# Altium PCB carrier board mixing.PcbDoc
Units mil, origin at the board's own origin, x right, y up, seen from the top; angles counter-clockwise.
Board outline 6000 x 4000 mil, 2 copper layers (Top Layer, Bottom Layer); 84 components, 167 nets, 452 pads, 0 vias.
Unrouted connection lines stored in the file: 258.
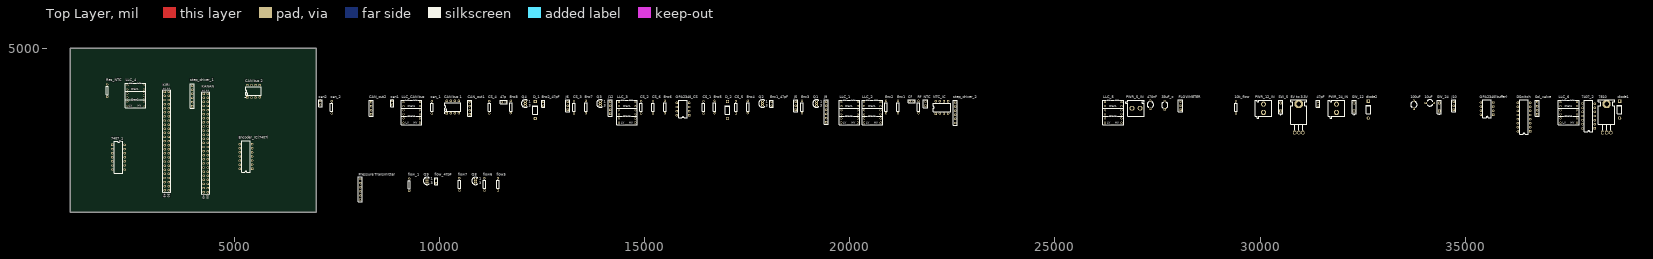
[diagram p0: Top Layer view]
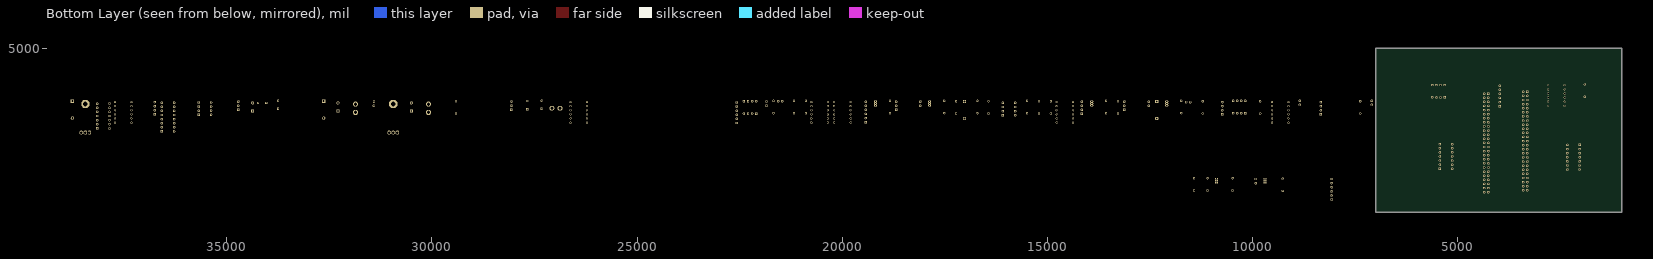
[diagram p1: Bottom Layer view, seen from below]

## Layer stack, top to bottom
Top Solder: solder mask 0.4, Solder Resist, Dk 3.5
Top Layer: signal copper 1.4
Dielectric 1: dielectric 12.6, FR-4, Dk 4.8
Bottom Layer: signal copper 1.4
Bottom Solder: solder mask 0.4, Solder Resist, Dk 3.5

## Board outline
1000,1000 7000,1000 7000,5000 1000,5000

## Design rules (kind name [scope] priority, off if disabled: settings)
Clearance [All] p1: gap=10
PolygonConnect [All] p1: connectstyle=Relief reliefconductorwidth=10 reliefentries=4 polygonreliefangle="90 Angle" airgapwidth=10
RoutingVias [All] p1: holewidth=28 width=50 viastyle="Through Hole" minholewidth=28 minwidth=50 maxholewidth=28 maxwidth=50
SolderMaskExpansion [All] p1: expansion=4
Width [All] p1: maxlimit=10 minlimit=10 preferedwidth=10
29 further rules are at their usual default settings.

## Components (designator, comment, footprint, x,y, rotation, side; value= is the part's Value field where it differs from the comment)
"5V to 3.3V" "7805" My_TO-220 30840,2940 r0 top
10k_flow "Res1" AXIAL-0.3 29410,3555 r90 top
10uF "Cap2" CAPR5-4X5 34135,3665 r0 top
33uF_c "Cap2" CAPR5-4X5 27675,3610 r90 top
47p "Cap" My_cap100n 11570,3685 r0 top
47pF "Cap" My_cap100n 31410,3645 r90 top
100uF "Cap2" CAPR5-4X5 33745,3620 r90 top
470nF "Cap2" CAPR5-4X5 27325,3620 r90 top
7407_1 "7407" 646-06 2180,2340 r270 top
7407_2 "7407" 646-06 38005,3345 r90 top
7810 "7805" My_TO-220 38345,2940 r0 top
can1 "Cap" My_cap100n 8850,3665 r90 top
can2 "Cap" My_cap100n 7100,3665 r90 top
"CAN bus 1" "MCP2551-I/P" PDIP300-P8 10325,3565 r90 top
"CAN bus 2" "MCP2551-I/P" PDIP300-P8 5470,3950 r90 top
can_1 "Res1" AXIAL-0.3 9815,3555 r90 top
can_2 "Res1" AXIAL-0.3 7375,3555 r90 top
CAN_out1 "Header 4" HDR1X4 10735,3385 r90 top
CAN_out2 "Header 4" HDR1X4 8335,3385 r90 top
Cf "Cap" My_cap100n 21510,3705 r0 top
CS_1 "Res1" AXIAL-0.3 16435,3555 r90 top
CS_2 "Res1" AXIAL-0.3 14915,3555 r90 top
CS_3 "Res1" AXIAL-0.3 13280,3555 r90 top
CS_4 "Res1" AXIAL-0.3 11215,3555 r90 top
CS_5 "Res1" AXIAL-0.3 17225,3555 r90 top
CS_6 "Res1" AXIAL-0.3 15205,3555 r90 top
D_1 "1N4001" DO-41 12335,3490 r90 top
D_2 "1N4001" DO-41 17020,3490 r90 top
diode1 "1N4001" DO-41 38760,3500 r90 top
diode2 "1N4001" DO-41 32635,3500 r90 top
DSwitch "ULN2068B" 648C-02 36430,3320 r90 top
Enc1 "Res1" AXIAL-0.3 21175,3565 r90 top
Enc1_47pF "Cap" My_cap100n 18095,3645 r90 top
Enc2 "Res1" AXIAL-0.3 20885,3565 r90 top
Enc2_47pF "Cap" My_cap100n 12530,3645 r90 top
Enc3 "Res1" AXIAL-0.3 18835,3565 r90 top
Enc4 "Res1" AXIAL-0.3 17515,3565 r90 top
Enc5 "Res1" AXIAL-0.3 16705,3565 r90 top
Enc6 "Res1" AXIAL-0.3 15495,3565 r90 top
Enc7 "Res1" AXIAL-0.3 13570,3565 r90 top
Enc8 "Res1" AXIAL-0.3 11740,3565 r90 top
Encoder_IC(7407) "SN74LS14N" 646-06 5285,2360 r90 top
flow5 "Res1" AXIAL-0.3 11425,1680 r90 top
flow6 "Res1" AXIAL-0.3 11095,1680 r90 top
flow7 "Res1" AXIAL-0.3 10485,1680 r90 top
flow_1 "Res1" AXIAL-0.3 9265,1670 r90 top
flow_47pF "Cap" My_cap100n 9925,1760 r90 top
FLOWMETER "Header 3" HDR1X3 28060,3495 r90 top
J5 "Header 3" HDR1X3 18685,3495 r90 top
J6 "Header 3" HDR1X3 13125,3495 r90 top
J9 "Header 6" HDR1X6 19425,3195 r90 top
J10 "Header 3" HDR1X3 34715,3495 r90 top
J12 "Header 4" HDR1X4 14160,3395 r90 top
KANAN "KANAN" HDR2X25 4255,3890 r270 top
KIRI "KIRI" HDR2X25 3305,3935 r270 top
LLC_1 "Logic Level Converter (3.3v - 5v) /  /  / https://www.sparkfun.com/products/8745" LOGIC_LEVEL_CONVERTER 19745,3135 r0 top
LLC_2 "Logic Level Converter (3.3v - 5v) /  /  / https://www.sparkfun.com/products/8745" LOGIC_LEVEL_CONVERTER 20300,3135 r0 top
LLC_3 "Logic Level Converter (3.3v - 5v) /  /  / https://www.sparkfun.com/products/8745" LOGIC_LEVEL_CONVERTER 14325,3135 r0 top
LLC_4 "Logic Level Converter (3.3v - 5v) /  /  / https://www.sparkfun.com/products/8745" LOGIC_LEVEL_CONVERTER 2345,3545 r0 top
LLC_5 "Logic Level Converter (3.3v - 5v) /  /  / https://www.sparkfun.com/products/8745" LOGIC_LEVEL_CONVERTER 26170,3135 r0 top
LLC_6 "Logic Level Converter (3.3v - 5v) /  /  / https://www.sparkfun.com/products/8745" LOGIC_LEVEL_CONVERTER 37270,3135 r0 top
"LLC_CAN bus" "Logic Level Converter (3.3v - 5v) /  /  / https://www.sparkfun.com/products/8745" LOGIC_LEVEL_CONVERTER 9075,3135 r0 top
NTC "Header 2" HDR1X2 21845,3595 r90 top
NTC_IC "LM358P" P008 22245,3555 r0 top
OPA2340(buffer) "LM358P" P008 35530,3525 r90 top
OPA2340_CS "LM358P" P008 15935,3515 r90 top
"Pressure Transmitter" "Header 6" HDR1X6 8075,1310 r90 top
PWR_5_IN "CON2 pin blue" My_CN2 26775,3735 r0 top
PWR_12_IN "CON2 pin blue" My_CN2 29880,3335 r90 top
PWR_24_IN "CON2 pin blue" My_CN2 31660,3335 r90 top
Q1 "BC337" TO-92 19190,3650 r0 top
Q2 "BC337" TO-92 17870,3650 r0 top
Q3 "BC337" TO-92 13920,3650 r0 top
Q4 "BC337" TO-92 12090,3650 r0 top
Q8 "BC337" TO-92 10880,1765 r0 top
Q9 "BC337" TO-92 9700,1765 r0 top
Res_NTC "Res1" AXIAL-0.3 1905,3965 r90 top
Rf "Res1" AXIAL-0.3 21675,3565 r90 top
Sol_valve "Header 4" HDR1X4 36750,3385 r90 top
step_driver_1 "Header 6" HDR1X6 3975,3585 r90 top
step_driver_2 "Header 6" HDR1X6 22570,3175 r90 top
SW_5 "SW-SPST" SPST-2 30500,3565 r90 top
SW_12 "SW-SPST" SPST-2 32290,3565 r90 top
SW_24 "SW-SPST" SPST-2 34365,3565 r90 top

## Footprints (in the part's own frame and the unit in brackets; to place one, negate y for a bottom-side part, rotate by r counter-clockwise, add the part's x,y. Pads: shape width x height; smd on the part's side, far side on the other; paste and mask are expansions set on the pad)
646-06 [mm] "DIP; 14 Leads; Row Spacing 7.62 mm; Pitch 2.54 mm"
  rect 1.5x1.5 hole 0.9: 1(-7.62,-3.81)
  round 1.5 hole 0.9: 2(-5.08,-3.81) 3(-2.54,-3.81) 4(0,-3.81) 5(2.54,-3.81) 6(5.08,-3.81) 7(7.62,-3.81) 8(7.62,3.81) 9(5.08,3.81) 10(2.54,3.81) 11(0,3.81) 12(-2.54,3.81) 13(-5.08,3.81) 14(-7.62,3.81)
  silkscreen extent -9.85,-2.65 9.85,2.65
648C-02 [mm] "DIP; 16 Leads; Row Spacing 7.62 mm; Pitch 2.54 mm"
  rect 1.5x1.5 hole 0.9: 1(-8.89,-3.81)
  round 1.5 hole 0.9: 2(-6.35,-3.81) 3(-3.81,-3.81) 4(-1.27,-3.81) 5(1.27,-3.81) 6(3.81,-3.81) 7(6.35,-3.81) 8(8.89,-3.81) 9(8.89,3.81) 10(6.35,3.81) 11(3.81,3.81) 12(1.27,3.81) 13(-1.27,3.81) 14(-3.81,3.81) 15(-6.35,3.81) 16(-8.89,3.81)
  silkscreen extent -10.7,-2.65 10.7,2.65
AXIAL-0.3 [mm] "Axial Device, Thru-Hole; 2 Leads; 0.3 in Pin Spacing"
  round 1.4 hole 0.85: 1(-3.81,0) 2(3.81,0)
  silkscreen extent -2.77,-0.76 2.77,0.76
CAPR5-4X5 [mm] "Capacitor; 2 Leads"
  rect 1.35x1.35 hole 0.8: 1(-2.5,0)
  round 1.35 hole 0.8: 2(2.5,0)
  silkscreen extent -1.69,-2 1.82,2
DO-41 [mm] "Diode, Axial; Body 5.2 x 2.7 mm (LxDia. max), Lead Dia. 0.86 mm (max)"
  round 2 hole 1.2: 1(-5.23,0)
  rect 2x2 hole 1.2: 2(5.23,0)
  silkscreen extent -2.65,-1.4 2.75,1.4
HDR1X2 [mm] "Connector; Header; 2 Position"
  rect 1.5x1.5 hole 0.9: 1(0,0)
  round 1.5 hole 0.9: 2(2.54,0)
  silkscreen extent -1.27,-1.27 3.81,1.27
HDR1X3 [mm] "Connector; Header; 3 Position"
  rect 1.5x1.5 hole 0.9: 1(0,0)
  round 1.5 hole 0.9: 2(2.54,0) 3(5.08,0)
  silkscreen extent -1.27,-1.27 6.35,1.27
HDR1X4 [mm] "Connector; Header; 4 Position"
  rect 1.5x1.5 hole 0.9: 1(0,0)
  round 1.5 hole 0.9: 2(2.54,0) 3(5.08,0) 4(7.62,0)
  silkscreen extent -1.27,-1.27 8.89,1.27
HDR1X6 [mm] "Connector; Header; 6 Position"
  rect 1.5x1.5 hole 0.9: 1(0,0)
  round 1.5 hole 0.9: 2(2.54,0) 3(5.08,0) 4(7.62,0) 5(10.16,0) 6(12.7,0)
  silkscreen extent -1.27,-1.27 13.97,1.27
HDR2X25 [mm] "Connector; Header; 25x2 Position"
  rect 1.5x1.5 hole 0.9: 1(0,0)
  round 1.5 hole 0.9: 2(0,2.54) 3(2.54,0) 4(2.54,2.54) 5(5.08,0) 6(5.08,2.54) 7(7.62,0) 8(7.62,2.54) 9(10.16,0) 10(10.16,2.54) 11(12.7,0) 12(12.7,2.54) 13(15.24,0) 14(15.24,2.54) 15(17.78,0) 16(17.78,2.54) 17(20.32,0) 18(20.32,2.54) 19(22.86,0) 20(22.86,2.54) 21(25.4,0) 22(25.4,2.54) 23(27.94,0) 24(27.94,2.54) 25(30.48,0) 26(30.48,2.54) 27(33.02,0) 28(33.02,2.54) 29(35.56,0) 30(35.56,2.54) 31(38.1,0) 32(38.1,2.54) 33(40.64,0) 34(40.64,2.54) 35(43.18,0) 36(43.18,2.54) 37(45.72,0) 38(45.72,2.54) 39(48.26,0) 40(48.26,2.54) 41(50.8,0) 42(50.8,2.54) 43(53.34,0) 44(53.34,2.54) 45(55.88,0) 46(55.88,2.54) 47(58.42,0) 48(58.42,2.54) 49(60.96,0) 50(60.96,2.54)
  silkscreen extent -1.27,-1.27 62.23,3.81
LOGIC_LEVEL_CONVERTER [mil]
  round 48 hole 32: P$1(50,550) P$2(50,450) P$3(50,350) P$4(50,250) P$5(50,150) P$6(50,50) P$7(450,50) P$8(450,150) P$9(450,250) P$10(450,350) P$11(450,450) P$12(450,550)
  silkscreen extent 0,0 500,600
My_cap100n [mil]
  oct 60x60 hole 40: 1(-50,0)
  round 60 hole 40: 2(50,0)
  silkscreen extent -90,-40 80,40
My_CN2 [mil]
  oct 120x120 hole 80: 1(99.5,-200.5)
  round 120 hole 80: 2(299.5,-200.5)
  silkscreen extent -45,-400 400,0
My_TO-220 [mil]
  oct 196.85x196.85 hole 118.11: 0(99.49,699.49)
  oct 80x100 hole 60: 1(-0.5,-0.5) 2(99.5,-0.5) 3(199.5,-0.5)
  silkscreen extent -100,60 300,800
P008 [mm] "DIP; 8 Leads; Row Spacing 7.62 mm; Pitch 2.54 mm"
  rect 1.5x1.5 hole 0.9: 1(-3.81,-3.81)
  round 1.5 hole 0.9: 2(-1.27,-3.81) 3(1.27,-3.81) 4(3.81,-3.81) 5(3.81,3.81) 6(1.27,3.81) 7(-1.27,3.81) 8(-3.81,3.81)
  silkscreen extent -5.5,-2.65 5.5,2.65
PDIP300-P8 [mm] "DIP, 8-Leads, Row Spacing 7.62mm, Pitch 2.54mm, Body 9.5x6.6mm"
  rect 1.5x1.5 hole 0.9: 1(-3.81,3.81)
  round 1.5 hole 0.9: 2(-3.81,1.27) 3(-3.81,-1.27) 4(-3.81,-3.81) 5(3.81,-3.81) 6(3.81,-1.27) 7(3.81,1.27) 8(3.81,3.81)
  silkscreen extent -3.93,-4.9 2.65,5.23, body extent -3.55,-4.9 3.55,4.9, height 5.34
SPST-2 [mm] "Switch; 2 Leads"
  rect 1.85x1.85 hole 1.1: 1(-2.54,0)
  round 1.85 hole 1.1: 2(2.54,0)
  silkscreen extent -4.89,-1.27 4.28,1.27
TO-92 [mm] "TO, Flat Index; 3 In-Line, Axial Leads; Body Dia. 4.6mm; Leads 0.41 x 0.39 mm (max)"
  oval 2x1 hole 0.7: 1(0,1.27) 2(0,0) 3(0,-1.27)
  silkscreen extent -2.34,-2.34 1.35,2.34

## Part data
"5V to 3.3V" 7810: "Regulator"
10k_flow can_1 can_2 CS_1 CS_2 CS_3 CS_4 CS_5 CS_6 Enc1 Enc2 Enc3 Enc4 Enc5 Enc6 Enc7 Enc8 flow5 flow6 flow7 flow_1 Res_NTC Rf: "Resistor"
10uF 33uF_c 100uF 470nF: "Capacitor"
47p 47pF can1 can2 Cf Enc1_47pF Enc2_47pF flow_47pF: library part "Cap ceramic", "CAP-100Nf"
7407_1 7407_2: library part SN74LS14N, "Hex Schmitt-Trigger Inverter"
"CAN bus 1" "CAN bus 2": "High-Speed CAN Transceiver, 8-Pin PDIP, Industrial Temperature"
CAN_out1 CAN_out2 J12 Sol_valve: "Header, 4-Pin"
D_1 D_2 diode1 diode2: library part "Diode 1N4001", "1 Amp General Purpose Rectifier"
DSwitch: "Quad 1.5A Darlington Switch"
Encoder_IC(7407): "Hex Schmitt-Trigger Inverter"
FLOWMETER J5 J6 J10: "Header, 3-Pin"
J9 "Pressure Transmitter" step_driver_1 step_driver_2: "Header, 6-Pin"
KANAN KIRI: library part "Header 25X2", "Header, 25-Pin, Dual row"
LLC_1 LLC_2 LLC_3 LLC_4 LLC_5 LLC_6 "LLC_CAN bus": library part LOGIC_LEVEL_CONVERTER
NTC: "Header, 2-Pin"
NTC_IC OPA2340(buffer) OPA2340_CS: "Dual Operational Amplifier"
PWR_5_IN PWR_12_IN PWR_24_IN: "Connector blue screw"
Q1 Q2 Q3 Q4 Q8 Q9: "Transistor, NPN, 300MHz, 40V, 200mA, SOT-23 pkg"
SW_5 SW_12 SW_24: "Single-Pole, Single-Throw Switch"

## Nets (pads, with @x,y where several pads share a name; then routed paths per layer and width w, separated by ;. In a path a pad name is that pad's centre, name@x,y a point inside that pad or via, vN(x,y) a via of type N, cw(c..) or ccw(c..) an arc to the next point about the centre after c; other vN are vias at no path point)
5V: LLC_3.P$9
DINPLC1: J9.4 LLC_1.P$12
DOPLC1: J9.1 LLC_1.P$7
DOPLC2: J9.2 LLC_1.P$8
DOPLC3: J9.3 LLC_1.P$11
DTR_5V: "Pressure Transmitter.4" LLC_2.P$11
GND: 10uF.2 33uF_c.2 47p.1 47pF.1 100uF.2 470nF.2 7407_1.7 7407_2.7 7810.2 "5V to 3.3V.2" "CAN bus 1.2" "CAN bus 2.2" "LLC_CAN bus.P$4" "LLC_CAN bus.P$9" "Pressure Transmitter.1" can1.1 can2.1 CAN_out1.1 CAN_out2.1 Cf.1 CS_4.1 D_1.1 diode2.1 DSwitch.4 DSwitch.5 DSwitch.12 DSwitch.13 Enc1_47pF.1 Enc2_47pF.1 Encoder_IC(7407).7 flow_47pF.1 FLOWMETER.1 J5.1 J6.1 J10.3 J12.4 KANAN.1 KANAN.2 KANAN.49 KANAN.50 KIRI.1 KIRI.2 KIRI.6 KIRI.24 KIRI.49 KIRI.50 LLC_1.P$4 LLC_1.P$9 LLC_2.P$4 LLC_2.P$9 LLC_3.P$4 LLC_3.P$10 LLC_4.P$4 LLC_4.P$9 LLC_5.P$4 LLC_5.P$9 LLC_6.P$4 LLC_6.P$9 NTC.1 NTC_IC.4 OPA2340(buffer).4 OPA2340_CS.4 PWR_5_IN.2 PWR_12_IN.2 PWR_24_IN.2 Q1.3 Q2.3 Q3.3 Q4.3 Q8.3 Q9.3
"Net5V to 3.3V_1": 10k_flow.2 470nF.1 "5V to 3.3V.1" "CAN bus 1.3" "CAN bus 2.3" "LLC_CAN bus.P$10" "Pressure Transmitter.2" can1.2 can2.2 CAN_out1.2 CAN_out2.2 D_2.2 diode1.2 Enc1.1 Enc2.1 Enc5.1 Enc6.1 flow5.1 flow6.1 FLOWMETER.2 J5.2 J6.2 J12.3 LLC_1.P$10 LLC_2.P$10 LLC_4.P$10 LLC_5.P$10 LLC_6.P$10 OPA2340(buffer).8 OPA2340_CS.8 step_driver_2.2 step_driver_2.4 step_driver_2.6 SW_5.2
"Net5V to 3.3V_3": 33uF_c.1 "5V to 3.3V.3" "LLC_CAN bus.P$3" LLC_1.P$3 LLC_2.P$3 LLC_3.P$3 LLC_4.P$3 LLC_5.P$3 LLC_6.P$3 NTC_IC.8 Res_NTC.2
Net10k_flow_1: 10k_flow.1 flow5.2 flow_47pF.2 FLOWMETER.3 Q8.1
Net10uF_1: 10uF.1 7810.3 DSwitch.14
Net47p_2: 47p.2 CS_6.2 D_1.2 D_2.1 OPA2340_CS.3
Net47pF_2: 47pF.2 diode1.1 diode2.2 J10.1 OPA2340(buffer).3
Net100uF_1: 100uF.1 7810.1 SW_12.2
Net7407_1_1: 7407_1.1 LLC_4.P$12
Net7407_1_2: 7407_1.2 step_driver_2.1
Net7407_1_3: 7407_1.3 LLC_4.P$11
Net7407_1_4: 7407_1.4 step_driver_2.3
Net7407_1_5: 7407_1.5 LLC_4.P$8
Net7407_1_6: 7407_1.6 step_driver_2.5
Net7407_1_8: 7407_1.8 step_driver_1.1
Net7407_1_9: 7407_1.9 LLC_5.P$12
Net7407_1_10: 7407_1.10 step_driver_1.3
Net7407_1_11: 7407_1.11 LLC_5.P$11
Net7407_1_12: 7407_1.12 step_driver_1.5
Net7407_1_13: 7407_1.13 LLC_5.P$8
Net7407_2_1: 7407_2.1 LLC_6.P$12
Net7407_2_2: 7407_2.2 DSwitch.3
Net7407_2_3: 7407_2.3 LLC_6.P$11
Net7407_2_4: 7407_2.4 DSwitch.6
Net7407_2_5: 7407_2.5 LLC_6.P$8
Net7407_2_6: 7407_2.6 DSwitch.11
Net7407_2_8: 7407_2.8 DSwitch.15
Net7407_2_9: 7407_2.9 LLC_6.P$7
"NetCAN bus 1_1": "CAN bus 1.1" "LLC_CAN bus.P$12"
"NetCAN bus 1_4": "CAN bus 1.4" "LLC_CAN bus.P$11"
"NetCAN bus 2_1": "CAN bus 2.1" "LLC_CAN bus.P$8"
"NetCAN bus 2_4": "CAN bus 2.4" "LLC_CAN bus.P$7"
Netcan_1_1: "CAN bus 1.6" can_1.1 CAN_out1.4
Netcan_1_2: "CAN bus 1.7" can_1.2 CAN_out1.3
Netcan_2_1: "CAN bus 2.6" can_2.1 CAN_out2.4
Netcan_2_2: "CAN bus 2.7" can_2.2 CAN_out2.3
NetCf_2: Cf.2 NTC_IC.3 Rf.2
NetCS_1_1: CS_1.1 CS_2.2 J9.5
NetCS_1_2: CS_1.2 CS_5.1 OPA2340_CS.6
NetCS_2_1: CS_2.1 CS_3.1 J9.6
NetCS_3_2: CS_3.2 CS_4.2 OPA2340_CS.5
NetCS_5_2: CS_5.2 CS_6.1 OPA2340_CS.7
NetDSwitch_1: DSwitch.1 DSwitch.9 J10.2 SW_24.2
NetDSwitch_2: DSwitch.2 Sol_valve.1
NetDSwitch_8: DSwitch.8 Sol_valve.2
NetDSwitch_10: DSwitch.10 Sol_valve.3
NetDSwitch_16: DSwitch.16 Sol_valve.4
NetEnc1_2: Enc1.2 Enc1_47pF.2 Encoder_IC(7407).4 Q1.1
NetEnc2_2: Enc2.2 Enc3.2 Q2.1
NetEnc2_47pF_2: Enc2_47pF.2 Enc5.2 Encoder_IC(7407).2 Q3.1
NetEnc3_1: Enc3.1 Q1.2
NetEnc4_1: Enc4.1 Q2.2
NetEnc4_2: Enc4.2 J5.3
NetEnc6_2: Enc6.2 Enc7.2 Q4.1
NetEnc7_1: Enc7.1 Q3.2
NetEnc8_1: Enc8.1 Q4.2
NetEnc8_2: Enc8.2 J6.3
NetEncoder_IC(7407)_1: Encoder_IC(7407).1 LLC_4.P$7
NetEncoder_IC(7407)_3: Encoder_IC(7407).3 LLC_5.P$7
NetEncoder_IC(7407)_5: Encoder_IC(7407).5 flow_1.2
NetEncoder_IC(7407)_6: Encoder_IC(7407).6 LLC_3.P$12
Netflow6_2: flow6.2 flow7.2 Q9.1
Netflow7_1: flow7.1 Q8.2
Netflow_1_1: flow_1.1 Q9.2
NetKANAN_5: KANAN.5 KANAN.6
NetKANAN_7: KANAN.7
NetKANAN_8: KANAN.8
NetKANAN_9: KANAN.9
NetKANAN_10: KANAN.10
NetKANAN_11: KANAN.11
NetKANAN_12: KANAN.12 LLC_5.P$5
NetKANAN_13: KANAN.13 LLC_5.P$2
NetKANAN_14: KANAN.14 LLC_5.P$1
NetKANAN_15: KANAN.15
NetKANAN_16: KANAN.16
NetKANAN_17: KANAN.17
NetKANAN_18: KANAN.18
NetKANAN_19: "LLC_CAN bus.P$5" KANAN.19
NetKANAN_20: "LLC_CAN bus.P$6" KANAN.20
NetKANAN_21: KANAN.21 KIRI.3 KIRI.4
NetKANAN_22: KANAN.22
NetKANAN_23: KANAN.23
NetKANAN_24: "LLC_CAN bus.P$1" KANAN.24
NetKANAN_25: "LLC_CAN bus.P$2" KANAN.25
NetKANAN_26: KANAN.26
NetKANAN_27: KANAN.27
NetKANAN_28: KANAN.28
NetKANAN_29: KANAN.29
NetKANAN_30: KANAN.30
NetKANAN_31: KANAN.31
NetKANAN_32: KANAN.32 LLC_6.P$6
NetKANAN_33: KANAN.33 LLC_6.P$5
NetKANAN_34: KANAN.34 LLC_6.P$2
NetKANAN_35: KANAN.35 LLC_6.P$1
NetKANAN_36: KANAN.36
NetKANAN_37: KANAN.37
NetKANAN_38: KANAN.38
NetKANAN_39: KANAN.39
NetKANAN_40: KANAN.40
NetKANAN_41: KANAN.41
NetKANAN_42: KANAN.42
NetKANAN_43: KANAN.43
NetKANAN_44: KANAN.44
NetKANAN_45: KANAN.45
NetKANAN_46: KANAN.46
NetKANAN_47: KANAN.47
NetKANAN_48: KANAN.48
NetKIRI_5: KIRI.5
NetKIRI_7: KIRI.7 NTC_IC.1 NTC_IC.2
NetKIRI_8: KIRI.8 OPA2340_CS.1 OPA2340_CS.2
NetKIRI_9: KIRI.9 OPA2340(buffer).1 OPA2340(buffer).2
NetKIRI_10: KIRI.10
NetKIRI_11: KIRI.11
NetKIRI_12: KIRI.12 LLC_3.P$1
NetKIRI_13: KIRI.13 LLC_3.P$5
NetKIRI_14: KIRI.14 LLC_3.P$6
NetKIRI_15: KIRI.15
NetKIRI_16: KIRI.16
NetKIRI_17: KIRI.17
NetKIRI_18: KIRI.18
NetKIRI_19: KIRI.19
NetKIRI_20: KIRI.20
NetKIRI_21: KIRI.21
NetKIRI_22: KIRI.22
NetKIRI_23: KIRI.23
NetKIRI_25: KIRI.25 LLC_4.P$1
NetKIRI_26: KIRI.26 LLC_5.P$6
NetKIRI_27: KIRI.27 LLC_4.P$5
NetKIRI_28: KIRI.28 LLC_4.P$2
NetKIRI_29: KIRI.29 LLC_1.P$6
NetKIRI_30: KIRI.30 LLC_4.P$6
NetKIRI_31: KIRI.31 LLC_1.P$2
NetKIRI_32: KIRI.32 LLC_1.P$5
NetKIRI_33: KIRI.33 LLC_2.P$6
NetKIRI_34: KIRI.34 LLC_1.P$1
NetKIRI_35: KIRI.35
NetKIRI_36: KIRI.36 LLC_2.P$5
NetKIRI_37: KIRI.37
NetKIRI_38: KIRI.38
NetKIRI_39: KIRI.39
NetKIRI_40: KIRI.40
NetKIRI_41: KIRI.41
NetKIRI_42: KIRI.42
NetKIRI_43: KIRI.43
NetKIRI_44: KIRI.44
NetKIRI_45: KIRI.45
NetKIRI_46: KIRI.46
NetKIRI_47: KIRI.47
NetKIRI_48: KIRI.48
NetNTC_2: NTC.2 Res_NTC.1 Rf.1
NetPWR_5_IN_1: PWR_5_IN.1 SW_5.1
NetPWR_12_IN_1: PWR_12_IN.1 SW_12.1
NetPWR_24_IN_1: PWR_24_IN.1 SW_24.1
Netstep_driver_1_2: step_driver_1.2 step_driver_1.4 step_driver_1.6
NRX: J12.2 LLC_3.P$8
NTX: J12.1 LLC_3.P$7
RTS_5V: "Pressure Transmitter.3" LLC_2.P$12
RXD_5V: "Pressure Transmitter.6" LLC_2.P$7
TXD_5V: "Pressure Transmitter.5" LLC_2.P$8
VCC: KANAN.3 KANAN.4
VDD: 7407_1.14 7407_2.14 Encoder_IC(7407).14
pads on no net: 7407_2.10 7407_2.11 7407_2.12 7407_2.13 7810.0 "5V to 3.3V.0" "CAN bus 1.5" "CAN bus 1.8" "CAN bus 2.5" "CAN bus 2.8" DSwitch.7 Encoder_IC(7407).8 Encoder_IC(7407).9 Encoder_IC(7407).10 Encoder_IC(7407).11 Encoder_IC(7407).12 Encoder_IC(7407).13 LLC_2.P$1 LLC_2.P$2 LLC_3.P$2 LLC_3.P$11 NTC_IC.5 NTC_IC.6 NTC_IC.7 OPA2340(buffer).5 OPA2340(buffer).6 OPA2340(buffer).7

## Text inside footprints (layer, text, board x,y; h text height)
KANAN: Top Overlay "50" at 4335,1410 h50 r270; Top Overlay "49" at 4235,1410 h50 r270; Top Overlay "1" at 4235,3990 h50 r270; Top Overlay "2" at 4335,3990 h50 r270
KIRI: Top Overlay "50" at 3385,1455 h50 r270; Top Overlay "49" at 3285,1455 h50 r270; Top Overlay "1" at 3285,4035 h50 r270; Top Overlay "2" at 3385,4035 h50 r270
LLC_1: Top Overlay "Chan1" at 19895,3535 h77.5; Top Overlay "Chan2" at 19895,3285 h77.5; Top Overlay "LV" at 19845,3685 h77.5; Top Overlay "LV" at 19845,3135 h77.5; Top Overlay "HV" at 20045,3685 h77.5; Top Overlay "HV" at 20045,3135 h77.5
LLC_2: Top Overlay "Chan1" at 20450,3535 h77.5; Top Overlay "Chan2" at 20450,3285 h77.5; Top Overlay "LV" at 20400,3685 h77.5; Top Overlay "LV" at 20400,3135 h77.5; Top Overlay "HV" at 20600,3685 h77.5; Top Overlay "HV" at 20600,3135 h77.5
LLC_3: Top Overlay "Chan1" at 14475,3535 h77.5; Top Overlay "Chan2" at 14475,3285 h77.5; Top Overlay "LV" at 14425,3685 h77.5; Top Overlay "LV" at 14425,3135 h77.5; Top Overlay "HV" at 14625,3685 h77.5; Top Overlay "HV" at 14625,3135 h77.5
LLC_4: Top Overlay "Chan1" at 2495,3945 h77.5; Top Overlay "Chan2" at 2495,3695 h77.5; Top Overlay "LV" at 2445,4095 h77.5; Top Overlay "LV" at 2445,3545 h77.5; Top Overlay "HV" at 2645,4095 h77.5; Top Overlay "HV" at 2645,3545 h77.5
LLC_5: Top Overlay "Chan1" at 26320,3535 h77.5; Top Overlay "Chan2" at 26320,3285 h77.5; Top Overlay "LV" at 26270,3685 h77.5; Top Overlay "LV" at 26270,3135 h77.5; Top Overlay "HV" at 26470,3685 h77.5; Top Overlay "HV" at 26470,3135 h77.5
LLC_6: Top Overlay "Chan1" at 37420,3535 h77.5; Top Overlay "Chan2" at 37420,3285 h77.5; Top Overlay "LV" at 37370,3685 h77.5; Top Overlay "LV" at 37370,3135 h77.5; Top Overlay "HV" at 37570,3685 h77.5; Top Overlay "HV" at 37570,3135 h77.5
"LLC_CAN bus": Top Overlay "Chan1" at 9225,3535 h77.5; Top Overlay "Chan2" at 9225,3285 h77.5; Top Overlay "LV" at 9175,3685 h77.5; Top Overlay "LV" at 9175,3135 h77.5; Top Overlay "HV" at 9375,3685 h77.5; Top Overlay "HV" at 9375,3135 h77.5
Q1: Top Overlay "1" at 19277.56,3672.05 h59.05; Top Overlay "3" at 19277.56,3569.88 h59.05
Q2: Top Overlay "1" at 17957.56,3672.05 h59.05; Top Overlay "3" at 17957.56,3569.88 h59.05
Q3: Top Overlay "1" at 14007.56,3672.05 h59.05; Top Overlay "3" at 14007.56,3569.88 h59.05
Q4: Top Overlay "1" at 12177.56,3672.05 h59.05; Top Overlay "3" at 12177.56,3569.88 h59.05
Q8: Top Overlay "3" at 10967.56,1684.88 h59.05; Top Overlay "1" at 10967.56,1787.05 h59.05
Q9: Top Overlay "3" at 9787.56,1684.88 h59.05; Top Overlay "1" at 9787.56,1787.05 h59.05